# EAGLE board adaptateur_fusible (EAGLE 6.4)
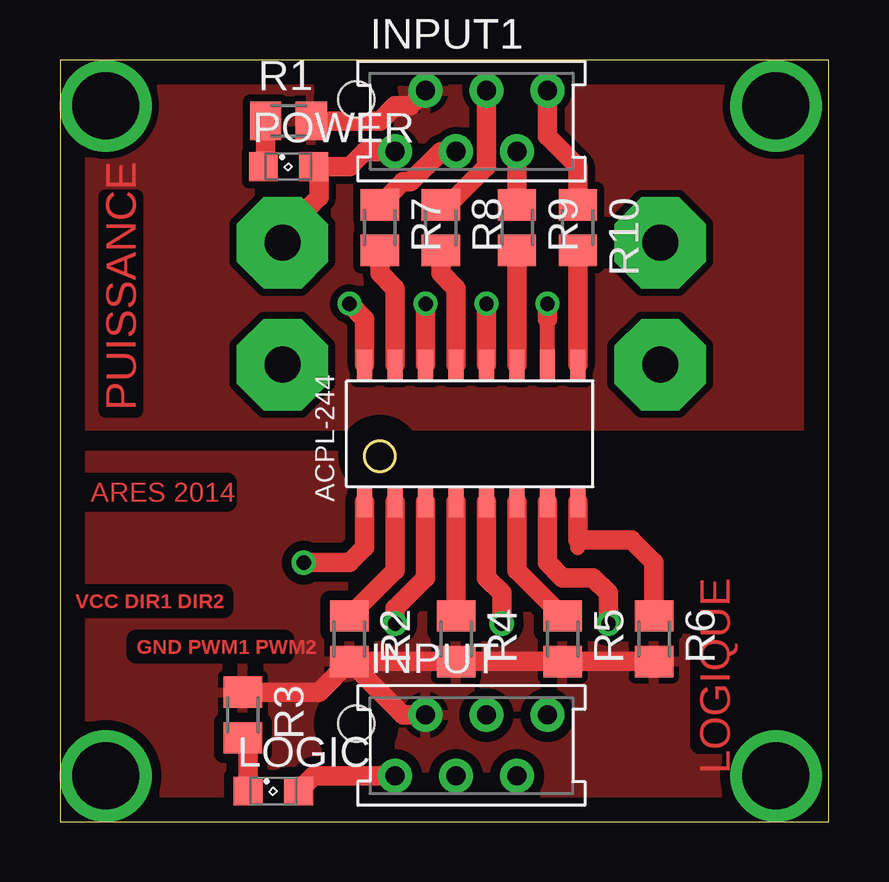
[diagram p0: board, top side]
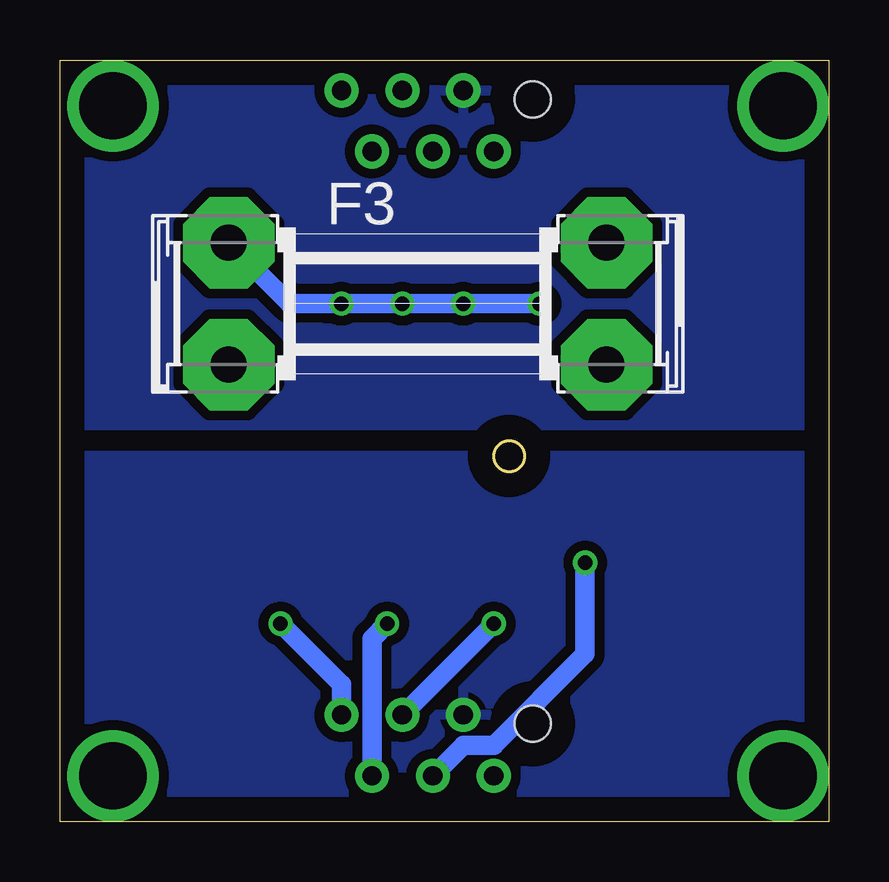
[diagram p1: board, bottom side, seen from below]

Size 32.05 x 31.74 mm. Coordinates in mm from the lower left corner, seen from the top.
Outline: 0,0 32.05,0 32.05,31.74 0,31.74 0,0
Copper layers (1*16): Top 0.035mm / dielectric 1.5mm / Bottom 0.035mm
Design rules "default *": minimum track width 0.4mm, minimum drill 0.8mm, track to track 0.3mm, track to pad 0.3mm, pad to pad 0.3mm, via to via 0.3mm, smd to smd 0.3mm, copper to edge 40mil, drill to drill 8mil, minimum pad ring 10mil, minimum via ring 8mil, stop-mask expansion 4mil, vias tented up to drill 0mil, thermal gap 10mil
vRestrict: area 10.8,12.1 to 21,19.1

## Footprints (pad centres in the part's own frame; a part is rotated, then mirrored left to right if it is on the bottom)
SHK20Q = drill 1.5 pad 3.81 octagon: 1A -7.874,2.54; 1B -7.874,-2.54; 2A 7.874,2.54; 2B 7.874,-2.54
AMP-215079-6 = drill 0.8 pad 1.422: 1 0,0; 2 1.27,2.54; 3 2.54,0; 4 3.81,2.54; 5 5.08,0; 6 6.35,2.54 | hole 1.5: -1.62,2.175
SML0805 = smd 1.2 x 1.2: A 1.05,0; C -1.05,0
M0805 = smd 1.3 x 1.6: 1 -0.95,0; 2 0.95,0
ACPL-244 = smd 1.27 x 0.635: 1 -0.635,9.525; 2 -0.635,8.255; 3 -0.635,6.985; 4 -0.635,5.715; 5 -0.635,4.445; 6 -0.635,3.175; 7 -0.635,1.905; 8 -0.635,0.635; 9 5.08,0.635; 10 5.08,1.905; 11 5.08,3.175; 12 5.08,4.445; 13 5.08,5.715; 14 5.08,6.985; 15 5.08,8.255; 16 5.08,9.525

## Placement (x,y rotation side)
F3  [SHK20Q]  17.14,21.59 0 bottom
INPUT  MMATCH-6-  [AMP-215079-6]  13.97,1.91 0 top
INPUT1  MMATCH-6-  [AMP-215079-6]  13.97,27.94 0 top
LOGIC  [SML0805]  8.89,1.27 0 top
POWER  [SML0805]  9.52,27.3 0 top
R1  1k  [M0805]  9.52,29.21 0 top
R2  1k  [M0805]  12.07,7.62 270 top
R3  1k  [M0805]  7.62,4.45 270 top
R4  1k  [M0805]  16.51,7.62 270 top
R5  1k  [M0805]  20.95,7.62 270 top
R6  1k  [M0805]  24.77,7.62 270 top
R7  470  [M0805]  13.34,24.77 270 top
R8  470  [M0805]  15.88,24.77 270 top
R9  470  [M0805]  19.05,24.77 270 top
R10  470  [M0805]  21.59,24.77 270 top
U$1  ACPL-244  [ACPL-244]  22.22,13.97 90 top

## Library data of the parts
F3 = fuse; OC_FARNELL: unknown; OC_NEWARK: unknown
INPUT INPUT1 = jt-con-micromatch
LOGIC POWER = led
R1-R10 = rcl
U$1 = acpl-244

## Nets
+5V: F3.2A INPUT1.1 POWER.A
C_DIR1: INPUT.3 U$1.1
C_DIR2: INPUT.5 U$1.5
C_PWM1: INPUT.4 U$1.3
C_PWM2: INPUT.6 U$1.7
DIR1: INPUT1.3 R7.1
DIR2: INPUT1.5 R9.1
FUSE_5V: F3.1A U$1.10 U$1.12 U$1.14 U$1.16
GND: INPUT.2 R2.2 R3.1 R4.2 R5.2 R6.2
GNDA: INPUT1.2 R1.2
N$1: R9.2 U$1.11
N$2: R2.1 U$1.2
N$3: POWER.C R1.1
N$4: LOGIC.C R3.2
N$10: R4.1 U$1.4
N$11: R5.1 U$1.6
N$12: R6.1 U$1.8
N$13: R7.2 U$1.15
N$14: R8.2 U$1.13
N$16: R10.2 U$1.9
PWM1: INPUT1.4 R8.1
PWM2: INPUT1.6 R10.1
VCC: INPUT.1 LOGIC.A

## Tracks (layer width: path | path; a pad name or v marks a point on that pad's centre or on a via)
+5V
  Top 0.813: INPUT1.1 12.7,27.94 12.07,27.3 POWER.A 10.8,27.09 10.8,26.04 9.27,24.51 F3.2A
C_DIR1  (via drill 0.6)
  Top 0.813: U$1.1 12.7,11.43 12.07,10.79 v10.16,10.79
  Bottom 0.813: v10.16,10.79 10.16,6.99 13.97,3.17 15.24,3.17 INPUT.3
C_DIR2  (via drill 0.6)
  Top 0.813: v18.41,8.26 18.41,9.53 17.78,10.16 U$1.5
  Bottom 0.813: INPUT.5 19.05,7.62 v18.41,8.26
C_PWM1  (via drill 0.6)
  Top 0.813: v13.97,8.26 13.97,8.89 15.24,10.16 U$1.3
  Bottom 0.813: INPUT.4 v13.97,8.26
C_PWM2  (via drill 0.6)
  Top 0.813: v22.86,8.26 22.86,9.53 22.22,10.16 20.95,10.16 20.32,10.79 U$1.7
  Bottom 0.813: INPUT.6 20.32,5.71 v22.86,8.26
DIR1
  Top 0.813: INPUT1.3 15.88,27.94 14.61,26.67 14.29,26.67 R7.1
DIR2
  Top 0.813: INPUT1.5 R9.1
FUSE_5V  (via drill 0.6)
  Top 0.813: U$1.16 12.7,20.95 v12.07,21.59 | U$1.14 v15.24,21.59 | U$1.12 v17.78,21.59 | 20.32,20.95 v20.32,21.59
  Bottom 0.813: v12.07,21.59 v15.24,21.59 v17.78,21.59 v20.32,21.59 20.95,21.59 22.48,21.59 F3.1A
GND
  Top 0.813: R6.2 R5.2 R4.2 R2.2 | R2.2 14.29,4.45 INPUT.2 | R2.2 10.79,5.39 R3.1
  pour Top (isolate 0.406): -5.71,15.24 -5.71,-7.62 38.73,-7.62 38.73,15.24
  pour Bottom (isolate 0.406): -3.17,15.24 36.2,15.24 36.2,-5.08 -3.17,-5.08
GNDA
  Top 0.813: R1.2 13.34,29.21 13.97,29.84 14.61,29.84 INPUT1.2
  pour Top (isolate 0.61): -6.98,16.51 38.73,16.51 38.73,31.75 -5.71,31.75
  pour Bottom (isolate 0.406): -2.54,33.66 -3.17,16.51 36.2,16.51 36.2,33.66
  pour Top: -8.89,16.51 36.83,16.51 36.83,36.83 -9.52,36.83 -9.52,36.2 -8.89,36.2
N$1
  Top 0.813: R9.2 U$1.11
N$2
  Top 0.813: R2.1 13.97,10.47 U$1.2
N$3
  Top 0.813: R1.1 8.57,27.41 POWER.C
N$4
  Top 0.813: LOGIC.C 7.84,3.27 R3.2
N$5  (via drill 2.8)
  other vias: 1.91,1.91
N$6  (via drill 2.8)
  other vias: 29.85,1.91
N$7  (via drill 2.8)
  other vias: 29.85,29.84
N$8  (via drill 2.8)
  other vias: 1.91,29.84
N$10
  Top 0.813: R4.1 U$1.4
N$11
  Top 0.813: R5.1 19.05,10.47 U$1.6
N$12
  Top 0.813: R6.1 24.77,10.79 23.81,11.74 21.59,11.74 U$1.8
N$13
  Top 0.813: R7.2 13.34,22.86 13.97,22.23 U$1.15
N$14
  Top 0.813: R8.2 15.88,22.86 16.51,22.23 U$1.13
N$16
  Top 0.813: R10.2 U$1.9
PWM1
  Top 0.813: R8.1 16.19,25.71 17.78,27.3 INPUT1.4
PWM2
  Top 0.813: INPUT1.6 20.32,28.57 21.59,27.3 R10.1
VCC
  Top 0.813: INPUT.1 10.57,1.91 LOGIC.A

## Text on the board
Top: PUISSANCE | ARES 2014 | LOGIQUE | VCC DIR1 DIR2 | GND PWM1 PWM2